# EAGLE board LogicShrimp-v2b (EAGLE 5.07)
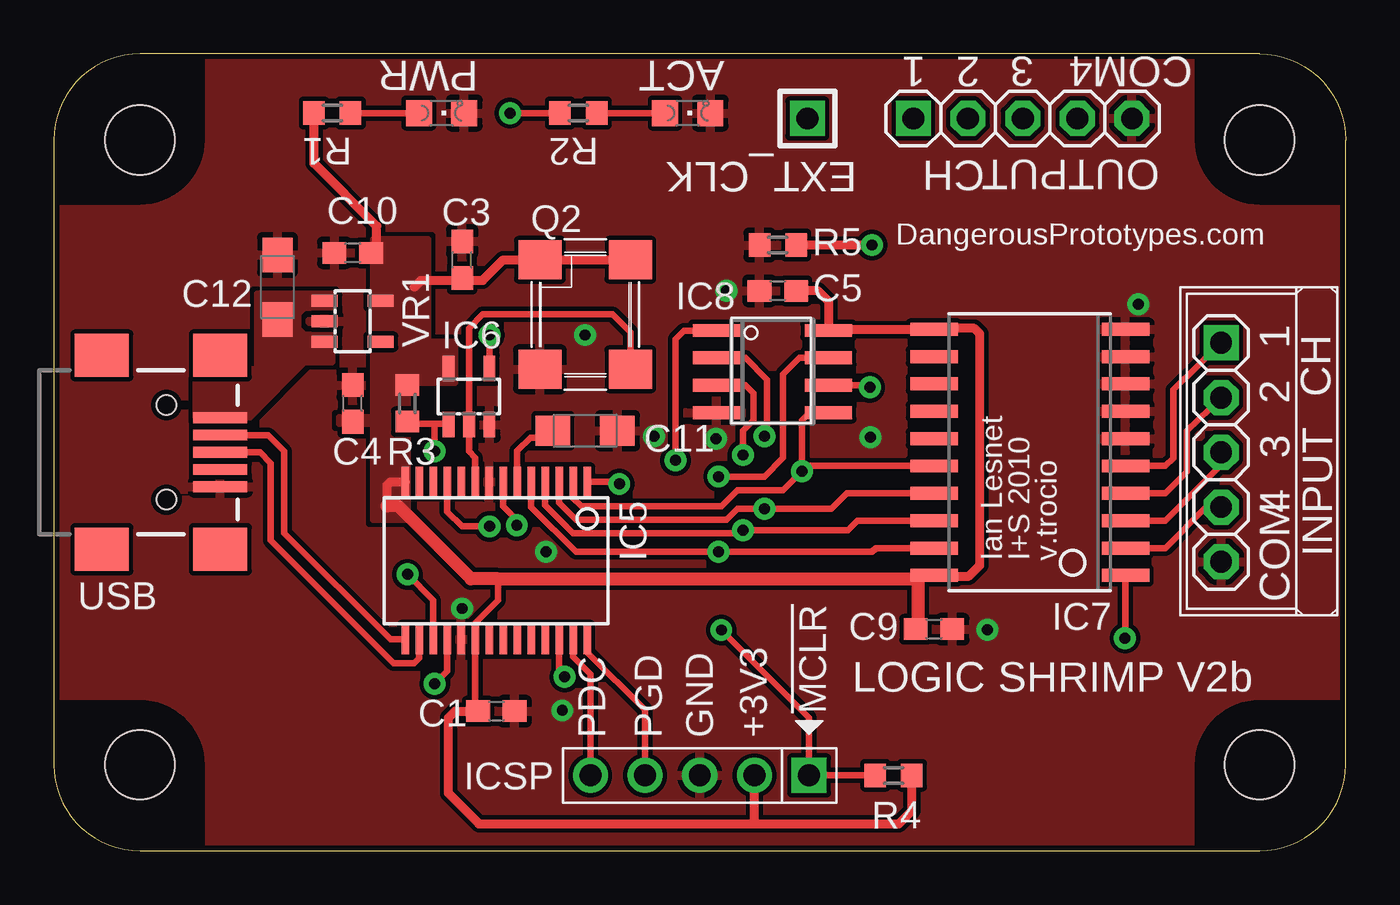
[diagram p0: board, top side]
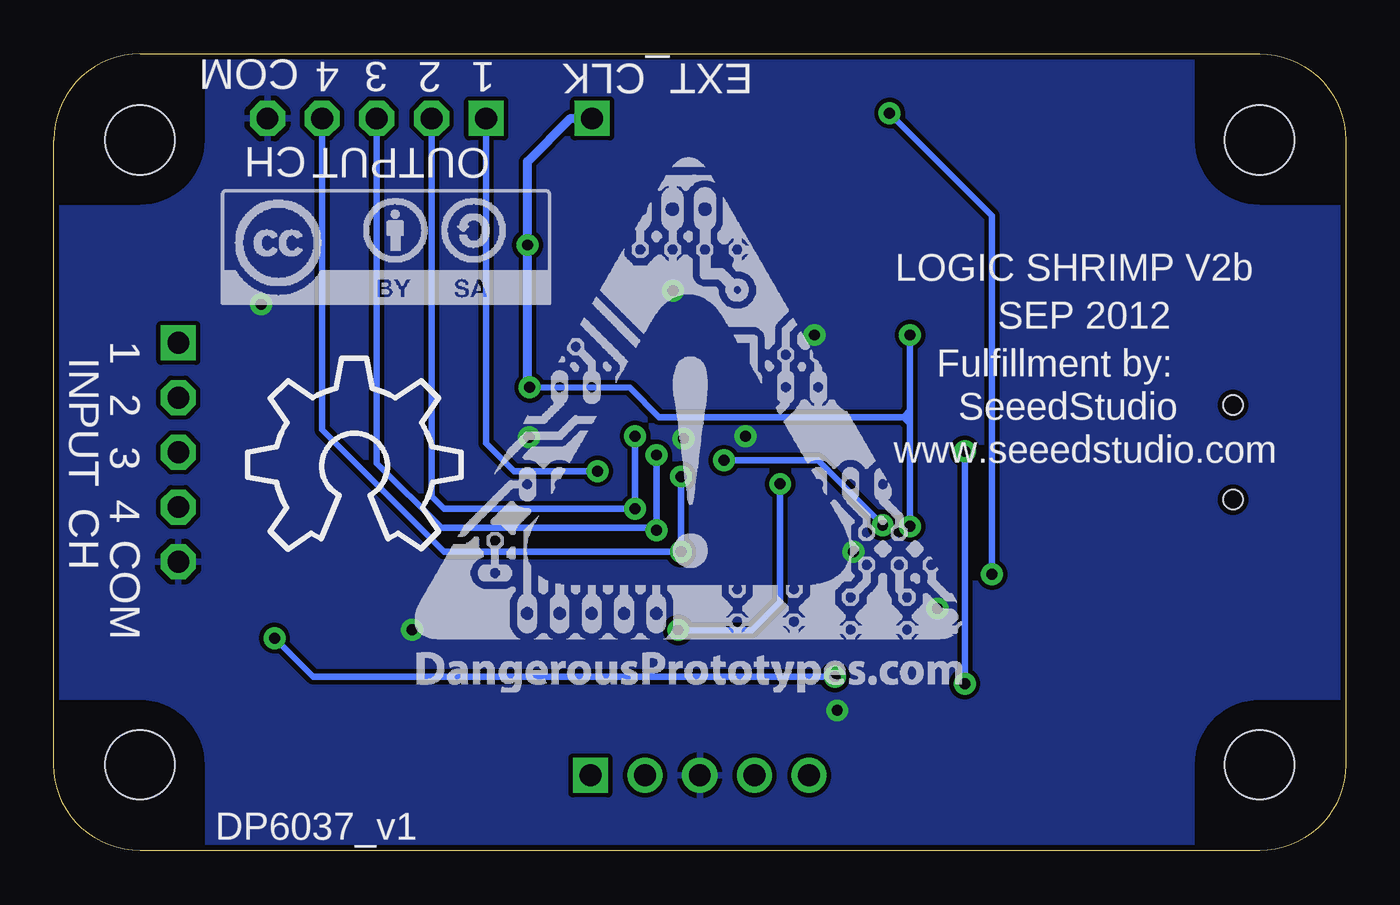
[diagram p1: board, bottom side, seen from below]

Size 60 x 37 mm. Coordinates in mm from the lower left corner, seen from the top.
Copper layers (1*16): Top 0.035mm / dielectric 1.5mm / Bottom 0.035mm
Design rules "SparkFun": minimum track width 8mil, minimum drill 20mil, track to track 8mil, track to pad 8mil, pad to pad 8mil, via to via 8mil, smd to smd 8mil, copper to edge 10mil, drill to drill 8mil, minimum pad ring 12mil, minimum via ring 10mil, stop-mask expansion 4mil, vias tented up to drill 25mil, thermal gap 10mil

## Footprints (pad centres in the part's own frame; a part is rotated, then mirrored left to right if it is on the bottom)
C0603 = smd 1.1 x 1: 1 -0.85,0; 2 0.85,0
SMC_A = smd 1.6 x 1.4: + -1.5,0; - 1.5,0
1X01 = drill 1.016 square: 1 0,0
SSOP28 = smd 0.348 x 1.397: 1 -4.225,-3.656; 2 -3.575,-3.656; 3 -2.925,-3.656; 4 -2.275,-3.656; 5 -1.625,-3.656; 6 -0.975,-3.656; 7 -0.325,-3.656; 8 0.325,-3.656; 9 0.975,-3.656; 10 1.625,-3.656; 11 2.275,-3.656; 12 2.925,-3.656; 13 3.575,-3.656; 14 4.225,-3.656; 15 4.225,3.656; 16 3.575,3.656; 17 2.925,3.656; 18 2.275,3.656; 19 1.625,3.656; 20 0.975,3.656; 21 0.325,3.656; 22 -0.325,3.656; 23 -0.975,3.656; 24 -1.625,3.656; 25 -2.275,3.656; 26 -2.925,3.656; 27 -3.575,3.656; 28 -4.225,3.656
SOT-23-5 = smd 0.55 x 1.2: 1 -0.95,-1.3; 2 0,-1.3; 3 0.95,-1.3; 4 0.95,1.3; 5 -0.95,1.3
SOIC-20 = smd 0.6 x 2.2: 1 -5.715,-4.445; 2 -4.445,-4.445; 3 -3.175,-4.445; 4 -1.905,-4.445; 5 -0.635,-4.445; 6 0.635,-4.445; 7 1.905,-4.445; 8 3.175,-4.445; 9 4.445,-4.445; 10 5.715,-4.445; 11 5.715,4.445; 12 4.445,4.445; 13 3.175,4.445; 14 1.905,4.445; 15 0.635,4.445; 16 -0.635,4.445; 17 -1.905,4.445; 18 -3.175,4.445; 19 -4.445,4.445; 20 -5.715,4.445
SOIC-8 = smd 0.6 x 2.2: 1 -1.905,-2.6; 2 -0.635,-2.6; 3 0.635,-2.6; 4 1.905,-2.6; 5 1.905,2.6; 6 0.635,2.6; 7 -0.635,2.6; 8 -1.905,2.6
HEADER_PRG_1X05 = drill 1.016 square: 1 -5.08,0 | drill 1.016 round: 2 -2.54,0; 3 0,0; 4 2.54,0; 5 5.08,0
1X05-S = drill 1.016 square: 1 -5.08,0 | drill 1.016 octagon: 2 -2.54,0; 3 0,0; 4 2.54,0; 5 5.08,0
LED-805 = smd 1.2 x 1.2: A 0,-1.05; C 0,1.05
DP6037_V1 = hole 3.2: 4,4; 56,4; 56,33; 4,33
OSCILLATOR_7X5_SMD = smd 1.8 x 2: 1 -2.54,-2.1; 2 2.54,-2.1; 3 2.54,2.1; 4 -2.54,2.1
R0603 = smd 1 x 1.1: 1 -0.85,0; 2 0.85,0
USB-MINIB = smd 2.5 x 0.5: D+ 2.5,0; D- 2.5,0.8; GND 2.5,-1.6; ID 2.5,-0.8; VBUS 2.5,1.6 | smd 2.5 x 2: GND@1 -3,-4.5; GND@2 -3,4.5; GND@3 2.5,4.5; GND@4 2.5,-4.5 | hole 0.9: 0,2.2; 0,-2.2
SOT23-5 = smd 0.55 x 1.2: 1 -0.95,-1.3; 2 0,-1.3; 3 0.95,-1.3; 4 0.95,1.3; 5 -0.95,1.3

## Placement (x,y rotation side)
C1  0.1uF  [C0603]  20.55,6.49 0 top
C3  0.1uF  [C0603]  18.96,27.44 90 top
C4  0.1uF  [C0603]  13.88,20.77 90 top
C5  0.1uF  [C0603]  33.62,26 180 top
C9  0.1uF  [C0603]  40.88,10.29 0 top
C10  1uF  [C0603]  13.88,27.76 180 top
C11  10uF  [SMC_A]  24.68,19.5 0 top
C12  10uF  [SMC_A]  10.39,26.17 90 top
EXT_CLK  [1X01]  35,34 180 top
IC5  PIC18F24J50  [SSOP28]  20.55,13.47 180 top
IC6  74LVC1G125  [SOT-23-5]  19.28,21.09 0 top
IC7  IC_74AC573  [SOIC-20]  45.33,18.5 90 top
IC8  IC_MEM_23LC1024  [SOIC-8]  33.38,22.25 270 top
ICSP  HEADER_PRG_PIC_ICSP  [HEADER_PRG_1X05]  30,3.5 180 top
INPUT  [1X05-S]  54.22,18.5 270 top
LED1  [LED-805]  18.01,34.25 270 top
LED2  [LED-805]  29.44,34.25 270 top
OUTPUT  [1X05-S]  45,34 0 top
PCB1  PCB_DP_RECTANGLE-37X60  [DP6037_V1]  0,0 0 top
Q2  20Mhz  [OSCILLATOR_7X5_SMD]  24.68,24.9 270 top
R1  1.1K  [R0603]  12.93,34.25 0 top
R2  1.1K  [R0603]  24.36,34.25 0 top
R3  10K  [R0603]  16.42,20.77 90 top
R4  10K  [R0603]  39,3.5 0 top
R5  1M  [R0603]  33.62,28.12 0 top
U$1  [OSHW_10X350_NOTEXT]  51,14 0 bottom
U$3  [DP_LOGO_ART_1X1]  43.21,7.37 0 bottom
U$4  [CC-BY-SA]  52.23,25.37 0 bottom
USB  USBSMD  [USB-MINIB]  5.23,18.5 0 top
VR1  V_REG_LDOSMD  [SOT23-5]  13.88,24.58 270 top

## Library data of the parts
C1 C4 C10 R1-R5 = resistor
C3 C5 C9 C11 C12 = rcl
EXT_CLK INPUT OUTPUT = pinhead-2
IC5 = dp_devices; PIC18FJ2X50: PIC18FJ2X50
IC6-IC8 ICSP LED1 LED2 PCB1 Q2 U$3 U$4 = dp_devices
U$1 = ohw-logo
USB VR1 = SparkFun

## Nets
+3V3: C1.1 C3.1 C4.1 C5.1 C9.1 C10.1 IC5.14 IC5.20 IC6.5 IC7.11 IC7.20 IC8.8 ICSP.2 Q2.1 Q2.4 R1.1 R3.2 R4.2 VR1.5
BUFF_!OE: IC5.26 IC7.1
CLK_GATE: IC5.18 IC6.1 R3.1
CS_0: IC5.7 IC8.1
GND: C1.2 C3.2 C4.2 C5.2 C9.2 C10.2 C11.- C12.- IC5.8 IC5.19 IC6.3 IC7.6 IC7.7 IC7.8 IC7.9 IC7.10 IC8.4 ICSP.3 INPUT.5 LED1.C LED2.C OUTPUT.5 Q2.2 R5.1 USB.GND VR1.2
ICSP_PGC: IC5.27 ICSP.5
ICSP_PGD: IC5.28 ICSP.4
LED: IC5.17 R2.1
MCLR: IC5.1 ICSP.1 R4.1
N$2: IC7.5 INPUT.1
N$3: IC7.4 INPUT.2
N$4: IC7.3 INPUT.3
N$5: IC7.2 INPUT.4
N$6: C11.+ IC5.6
N$7: LED1.A R1.2
N$8: LED2.A R2.2
OSC_CLK: IC5.9 IC6.2 Q2.3
SCLK: EXT_CLK.1 IC5.11 IC6.4 IC8.6 R5.2
SDIO_0: IC5.2 IC7.16 IC8.5 OUTPUT.1
SDIO_1: IC5.3 IC7.17 IC8.2 OUTPUT.2
SDIO_2: IC5.4 IC7.18 IC8.3 OUTPUT.3
SDIO_3: IC5.5 IC7.19 IC8.7 OUTPUT.4
USB_D+: IC5.16 USB.D+
USB_D-: IC5.15 USB.D-
VUSB: C12.+ USB.VBUS VR1.1 VR1.3

## Tracks (layer width: path | path; a pad name or v marks a point on that pad's centre or on a via)
+3V3
  Top 0.305: C1.1 19.57,6.61 IC5.20 19.57,10.57 20.62,11.62 20.62,12.62
  Top 0.406: Q2.4 Q2.1 20.87,27.44 19.91,26.49 19.07,26.49 C3.1 18.96,26.49 17.06,26.49 16.74,26.17 | IC5.14 15.63,17.13 15.47,16.96 15.47,16.01 | C1.1 18.64,6.49 18.33,6.17 18.33,2.67 19.75,1.25 32.5,1.25 | C9.1 40.3,10.56 | ICSP.2 32.54,1.29 32.5,1.25 | 32.5,1.25 39.25,1.25 39.85,1.85 R4.2 | C5.1 35.5,26 36,25.5 36,24.18 | 36,24.18 IC8.8 | 36,24.18 40.26,24.18 40.3,24.21 IC7.11 40.97,24.21 41,24.25 42.75,24.25 43,24 43,13.25 42.5,12.75 40.84,12.75 | R1.1 12.08,31.92 15,29 15,28.02 C10.1 | 40.84,12.75 IC7.20 | 40.84,12.75 40.26,12.75 40.14,12.62
  Top 0.61: 15.47,16.01 15.99,16.01 19.38,12.62 20.62,12.62 40.14,12.62 40.14,10.4 C9.1
  pour Top (no thermals): 14.84,28.39 17.38,28.39 17.38,23.63 18.64,23.63 18.64,21.73 16.42,21.73 16.42,15.38 14.84,15.38 14.84,19.82 13.25,19.82 13.25,20.14 14.84,20.14
BUFF_!OE  (via drill 0.51)
  Top 0.305: IC5.26 23.48,8.32 v23.73,8.07 | IC7.1 49.77,9.89 v49.75,9.88
  Bottom 0.305: v23.73,8.07 47.95,8.07 v49.75,9.88
CLK_GATE  (via drill 0.51)
  Top 0.305: IC6.1 18.27,19.73 18.27,19.77 18.33,19.82 17.69,19.82 | 17.69,19.82 16.74,19.82 R3.1 | IC5.18 18.27,8.34 v17.69,7.75 | v17.69,18.55 17.69,19.82
  Bottom 0.305: v17.69,7.75 v17.69,18.55
CS_0  (via drill 0.51)
  Top 0.305: IC5.7 20.88,16 21.5,15.38 v21.5,15.12 | IC8.1 29.28,24.16 28.88,23.75 v28.88,18.12
  Bottom 0.305: v28.88,18.12 24.51,18.12 v21.5,15.12
GND  (via drill 0.51)
  other vias: 18.96,11.25 31.25,26 24.68,23.95 50.38,25.38 22.86,13.89 30.75,19.12 27.88,19.25 37.93,19.2 23.61,6.51 43.37,10.27
  pour Top (rank 6): 0,36.83 59.69,36.83 59.69,0 0,0
  pour Bottom (rank 6): 0,36.83 59.69,36.83 59.69,0 0,0
ICSP_PGC
  Top 0.305: IC5.27 24.12,9 24.92,8.21 ICSP.5
ICSP_PGD
  Top 0.305: ICSP.4 27.46,6.54 24.77,9.22 IC5.28
LED  (via drill 0.51)
  Top 0.305: IC5.17 17.62,11.63 v16.42,12.84 | v21.18,34.25 R2.1
  Bottom 0.305: v16.42,12.84 16.42,29.49 v21.18,34.25
MCLR  (via drill 0.51)
  Top 0.305: IC5.1 26.11,17.13 v26.27,17.03 | R4.1 ICSP.1 35.08,6.17 v31,10.25
  Bottom 0.305: v26.27,17.03 26.27,11.56 27.58,10.25 v31,10.25
N$2
  Top 0.305: INPUT.1 51.99,21.41 51.99,18.23 51.62,17.86 IC7.5
N$3
  Top 0.305: INPUT.2 52.63,19.5 52.63,17.6 51.62,16.59 IC7.4
N$4
  Top 0.305: INPUT.3 54.22,17.91 51.62,15.32 IC7.3
N$5
  Top 0.305: INPUT.4 53.58,16.01 51.62,14.05 IC7.2
N$6
  Top 0.305: IC5.6 21.52,18.57 22.14,19.18 22.86,19.18 C11.+
N$7
  Top 0.305: R1.2 LED1.A
N$8
  Top 0.305: R2.2 LED2.A
OSC_CLK
  Top 0.305: Q2.3 26.78,24.07 25.95,24.9 19.91,24.9 19.28,24.27 IC6.2 19.28,18.55 19.57,18.25 IC5.9
SCLK  (via drill 0.51)
  Top 0.305: IC6.4 20.23,23.63 v20.23,23.95 | v20.23,15.06 18.96,15.06 18.27,15.74 IC5.11 | IC8.6 37.8,21.61 v37.9,21.51
  Top 0.406: v38,28.12 R5.2
  Bottom 0.305: 20.23,20.14 20.55,20.14 | 20.55,20.14 31.89,20.14 33.25,21.5 v37.9,21.51 | 20.23,20.14 20.23,20.45 | 20.23,20.45 v20.23,23.95 | v20.23,15.06 20.23,19.82 | 20.23,19.82 20.23,20.14 | 20.55,20.14 20.23,20.45 | 20.23,19.82 20.55,20.14
  Bottom 0.406: EXT_CLK.1 36,34 38,32 v38,28.12 38,21.61 v37.9,21.51
SDIO_0  (via drill 0.51)
  Top 0.305: IC5.2 24.12,16.38 24.5,16 31,16 31.75,16.75 33.88,16.75 v34.75,17.62 | IC8.5 35.09,20.34 34.75,20 v34.75,17.62 | IC7.16 34.99,17.86 v34.75,17.62
  Bottom 0.305: OUTPUT.1 39.92,18.92 38.62,17.62 v34.75,17.62
SDIO_1  (via drill 0.51)
  Top 0.305: IC5.3 23.48,16.15 24.25,15.38 31.25,15.38 31.75,15.88 v33,15.88 36.12,15.88 36.84,16.59 IC7.17 | IC8.2 32.12,22.89 33.12,21.88 33.12,19.38 v33,19.25
  Bottom 0.305: v33,19.25 v33,15.88 41.88,15.88 42.46,16.46 OUTPUT.2
SDIO_2  (via drill 0.51)
  Top 0.305: IC5.4 22.82,16.05 24.12,14.75 31.88,14.75 v32,14.88 36.88,14.88 37,15 37.33,15.32 IC7.18 | IC8.3 32.13,21.61 32.5,21.25 32.5,20 32,19.5 v32,18.38
  Bottom 0.305: v32,18.38 v32,14.88 32.12,15 42,15 45,18 OUTPUT.3
SDIO_3  (via drill 0.51)
  Top 0.305: 22.18,16.32 IC5.5 22.18,15.95 24.25,13.88 v30.88,13.88 38,13.88 38.18,14.05 IC7.19 | IC8.7 34.63,22.89 33.88,22.12 33.88,18.25 33,17.38 v30.88,17.38
  Bottom 0.305: v30.88,17.38 v30.88,13.88 41.88,13.88 47.54,19.54 OUTPUT.4
USB_D+
  Top 0.305: IC5.16 16.98,8.94 16.74,8.71 15.79,8.71 10.07,14.42 10.07,18 9.57,18.5 USB.D+
USB_D-
  Top 0.305: 16.32,10.07 IC5.15 15.63,9.81 10.71,14.74 10.71,18.55 9.96,19.3 USB.D-
VUSB
  pour Top (no thermals): 6.58,20.14 6.58,22.36 9.44,22.36 9.44,25.85 12.93,25.85 12.93,25.22 11.66,25.22 11.34,24.9 11.34,24.27 11.66,23.95 12.93,23.95 12.93,22.68 11.66,22.68 9.12,20.14

## Text on the board
tPlace: PWR | ACT | 1 | 2 | 3 | 4 | COM | CH | 1 | 2 | CH | 3 | 4 | COM | LOGIC SHRIMP V2b | !MCLR | PDC | PGD | GND | +3V3
bPlace: EXT_CLK | 1 | 2 | 3 | 4 | COM | OUTPUT | CH | SEP 2012 | 1 | INPUT | 2 | 3 | 4 | CH | COM
tNames: DangerousPrototypes.com | Ian Lesnet | I+S 2010 | v.trocio
bNames: LOGIC SHRIMP V2b | Fulfillment by: | SeeedStudio | www.seeedstudio.com
Reference: LOGIC SHRIMP V2b | CC-BY-SA | Ian Lesnet 2012 | http://dangerousprototypes.com